# Altium PCB CamLink.PcbDoc (part 1 of 2)
Units mm, origin at the board's own origin, x right, y up, seen from the top; angles counter-clockwise.
Board outline 65 x 55 mm, 4 copper layers (TOP SIG, PWR, GND, BOT SIG), stack 1.586 mm thick; 141 components, 88 nets, 397 pads, 242 vias.
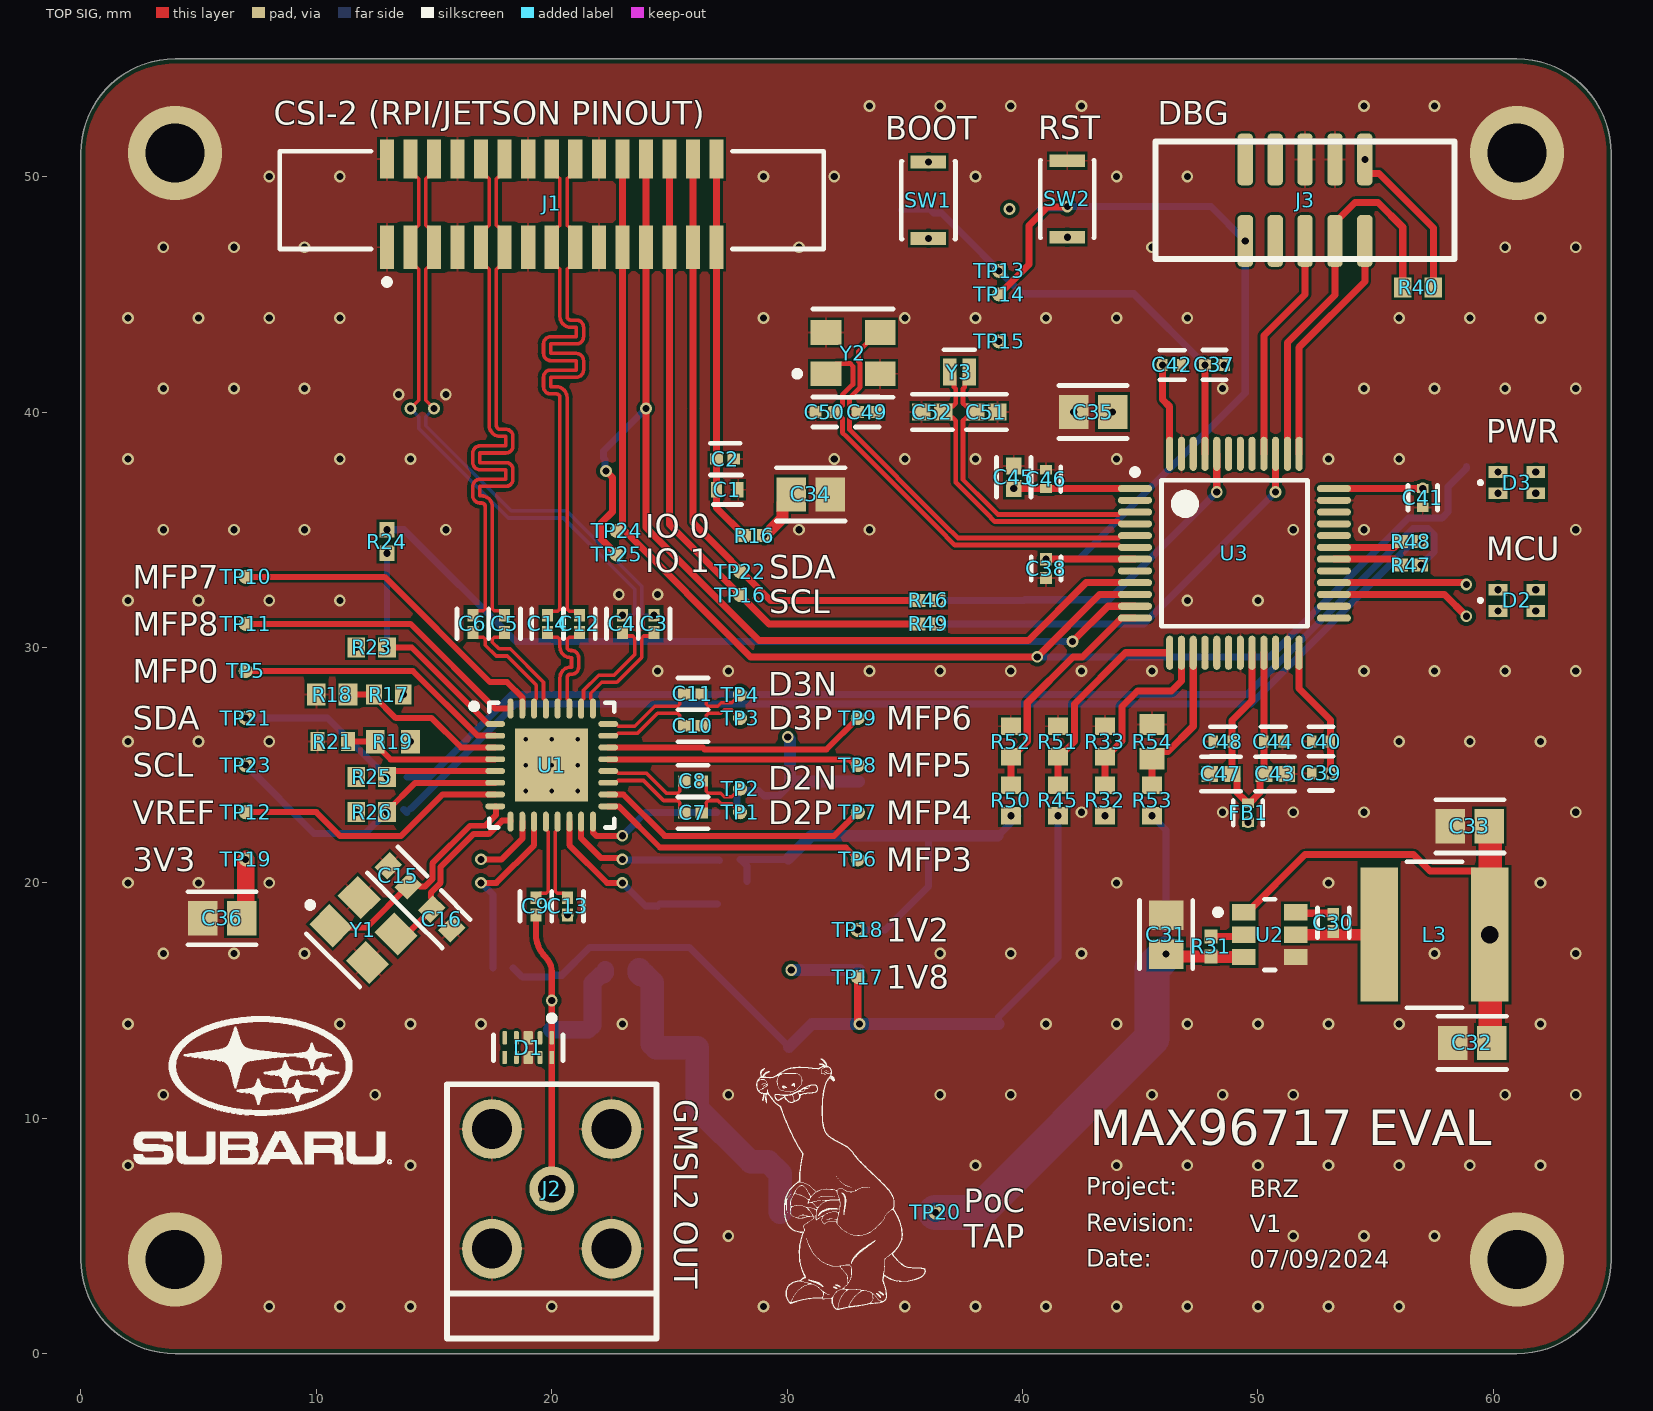
[diagram p0: TOP SIG view]
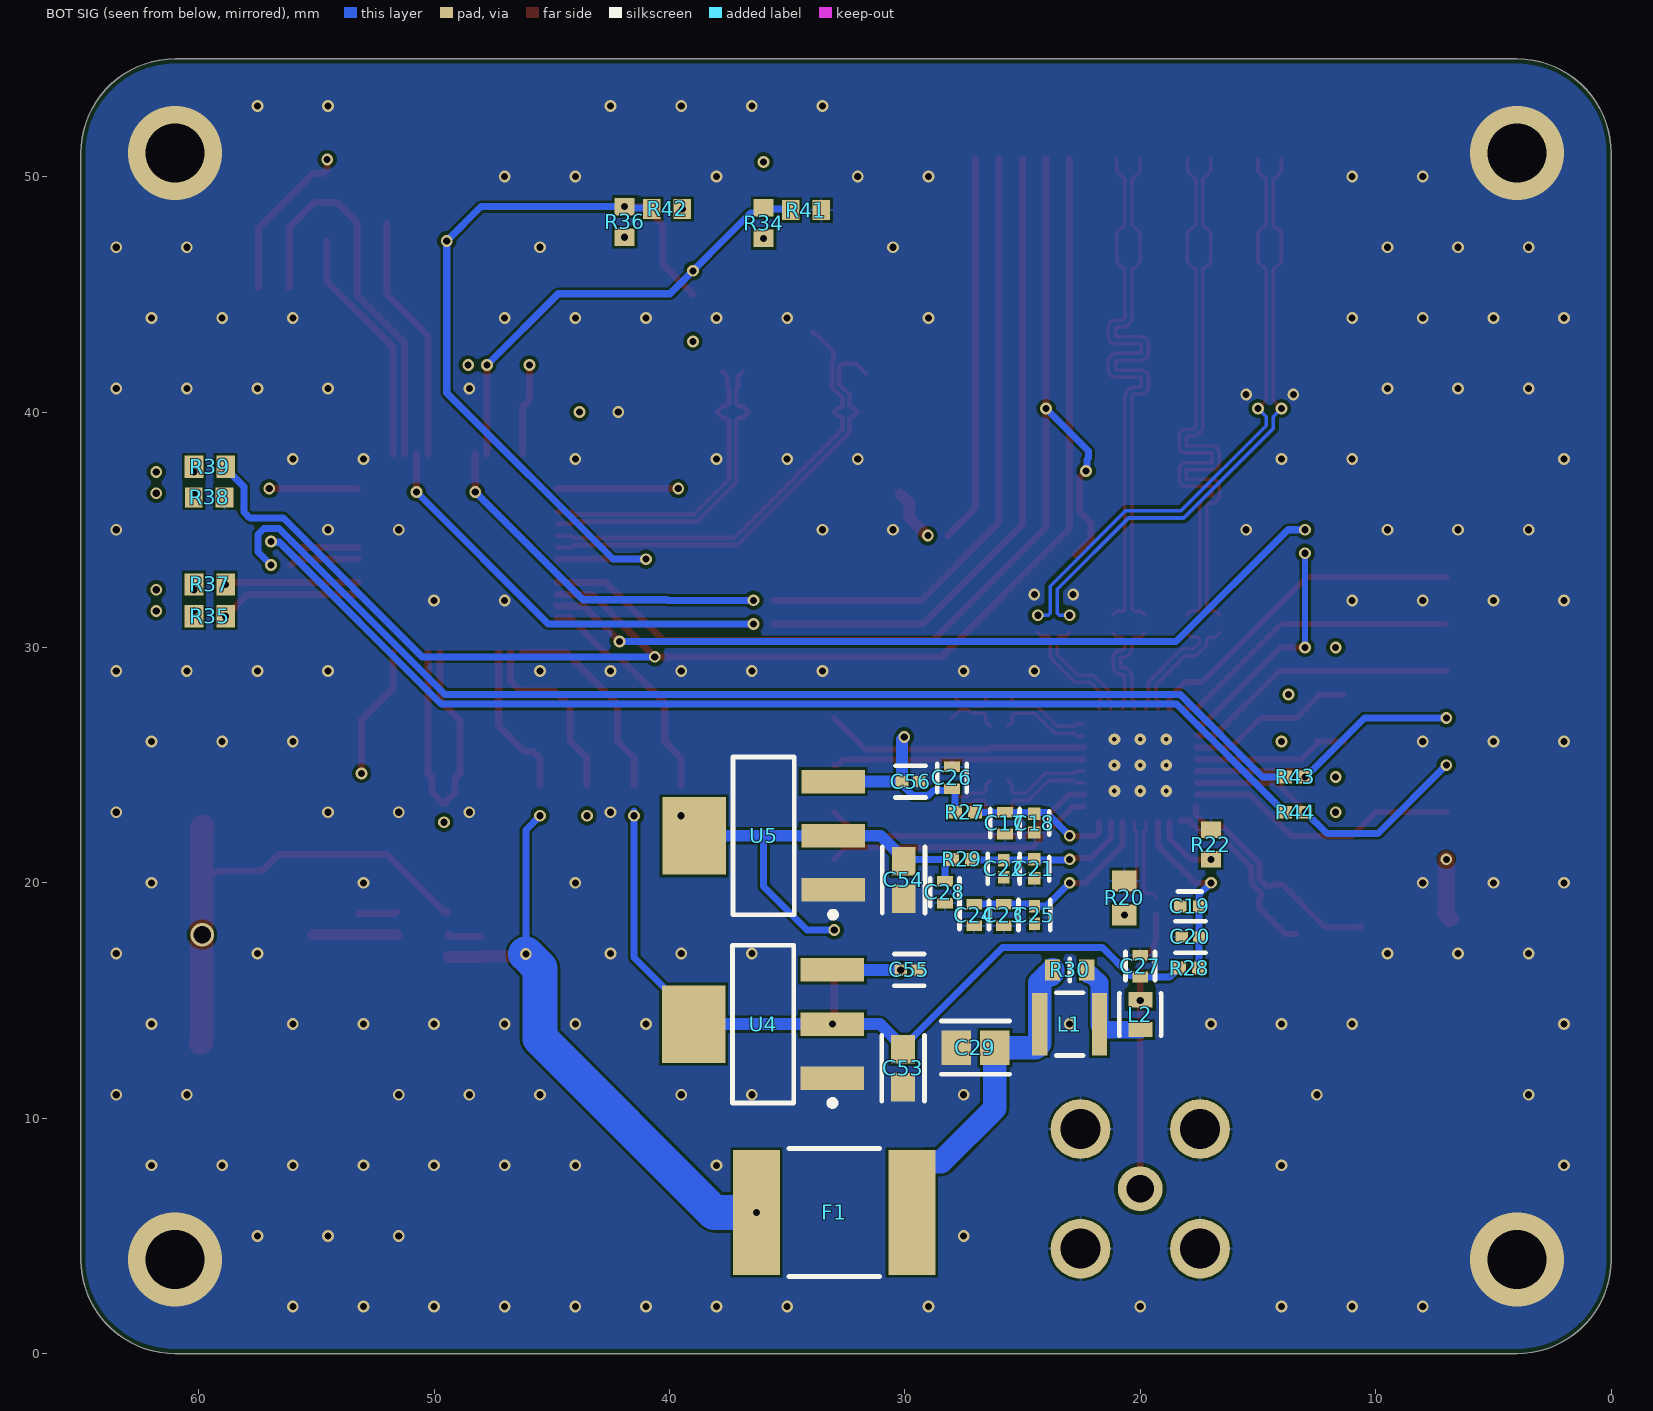
[diagram p1: BOT SIG view, seen from below]
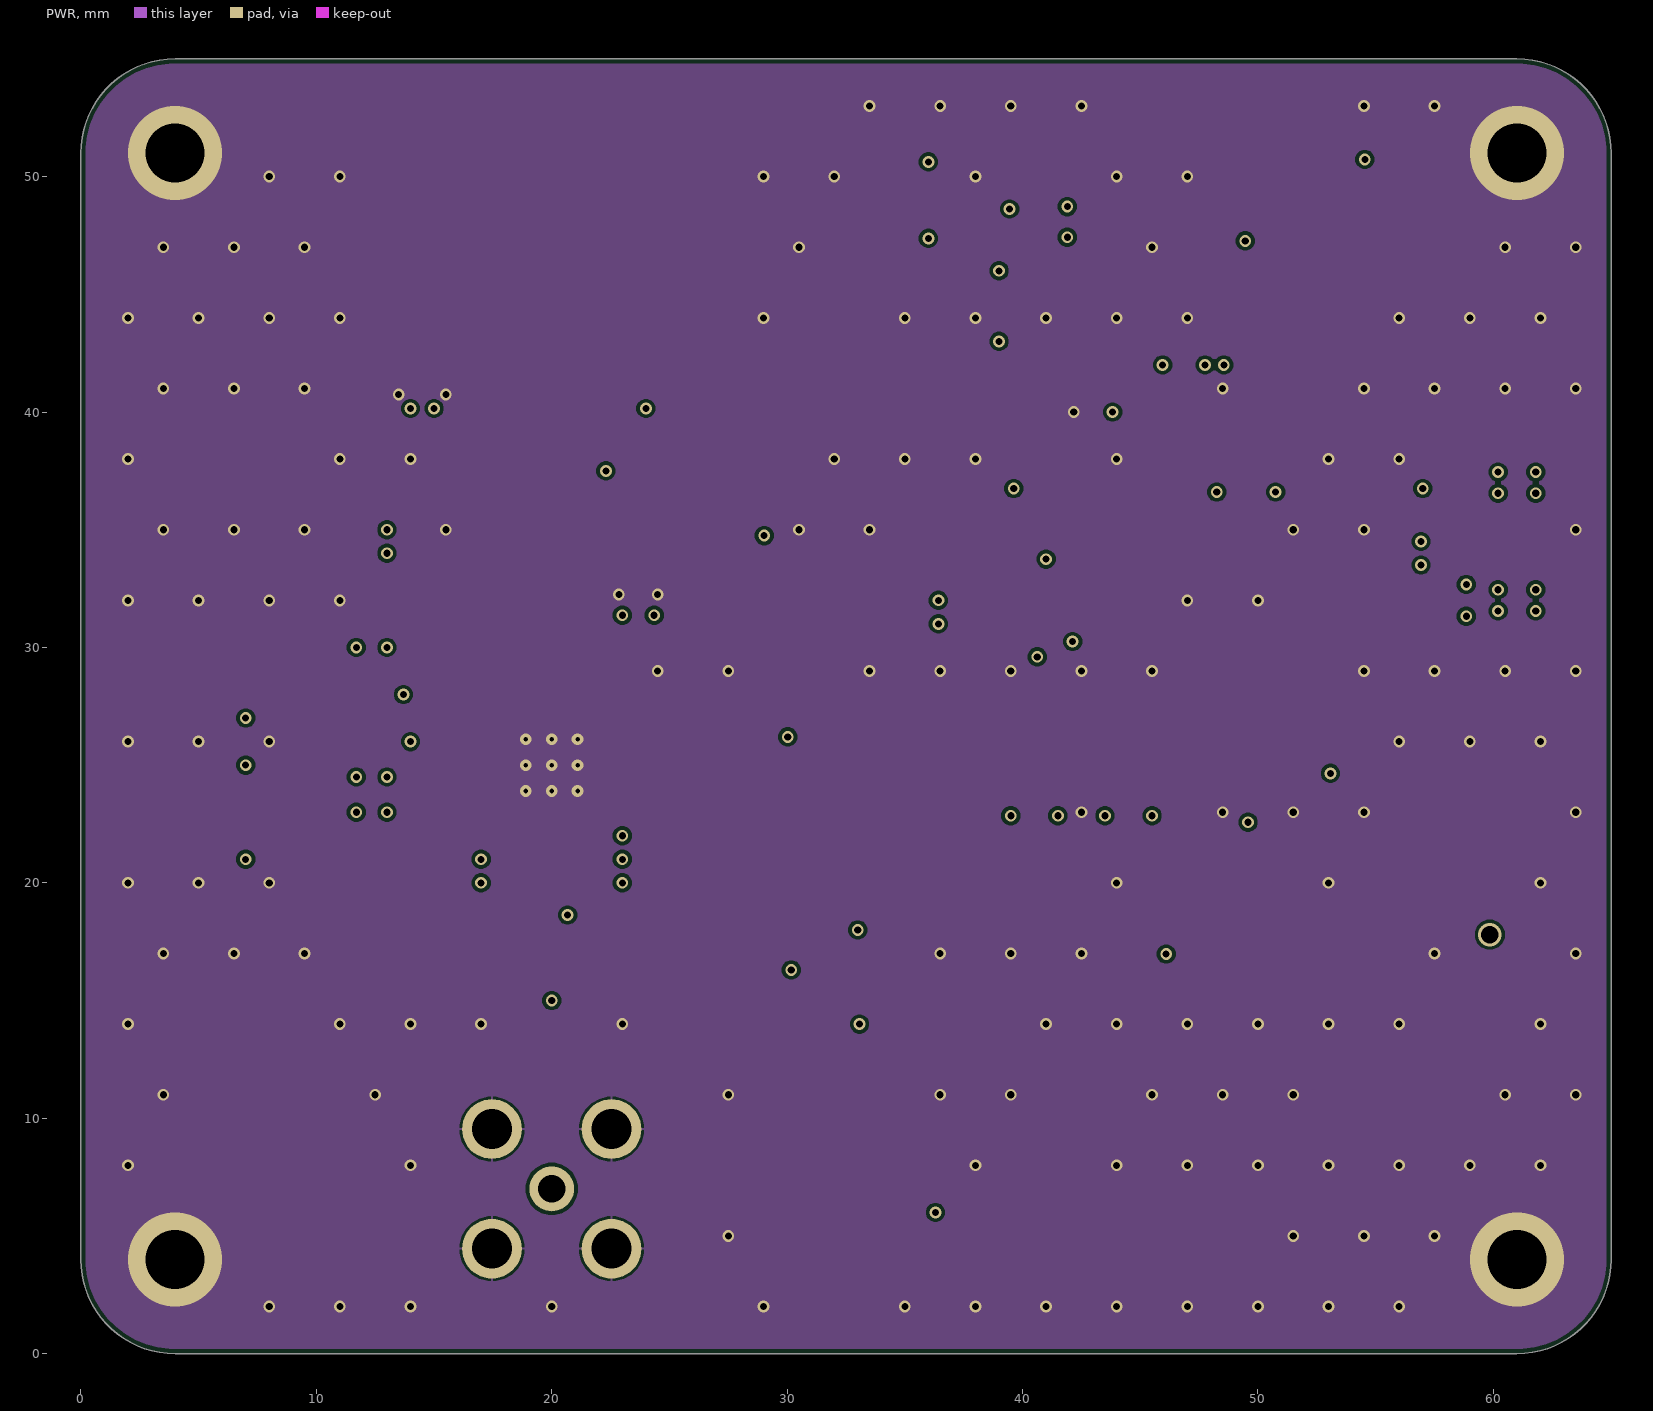
[diagram p2: PWR]
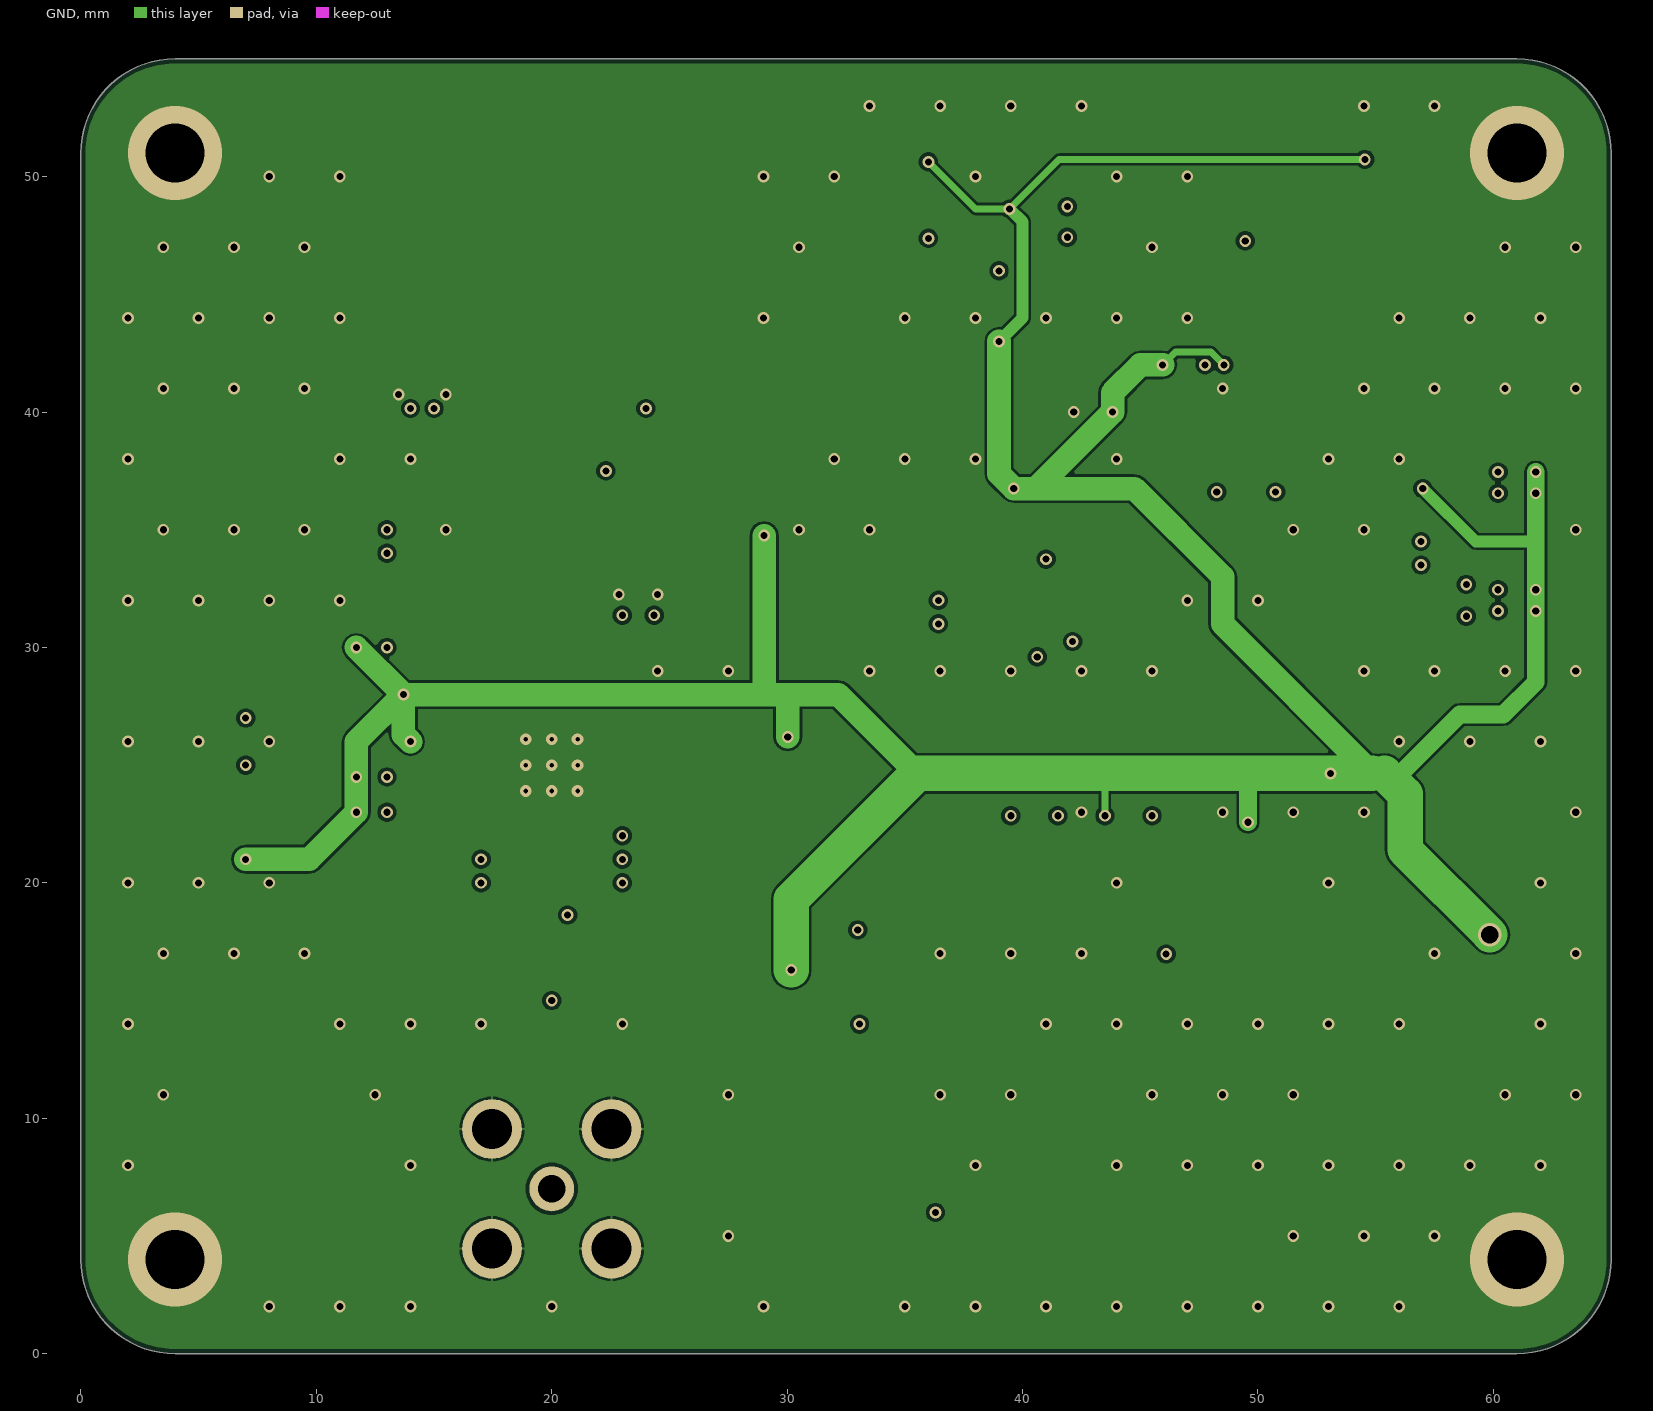
[diagram p3: GND]
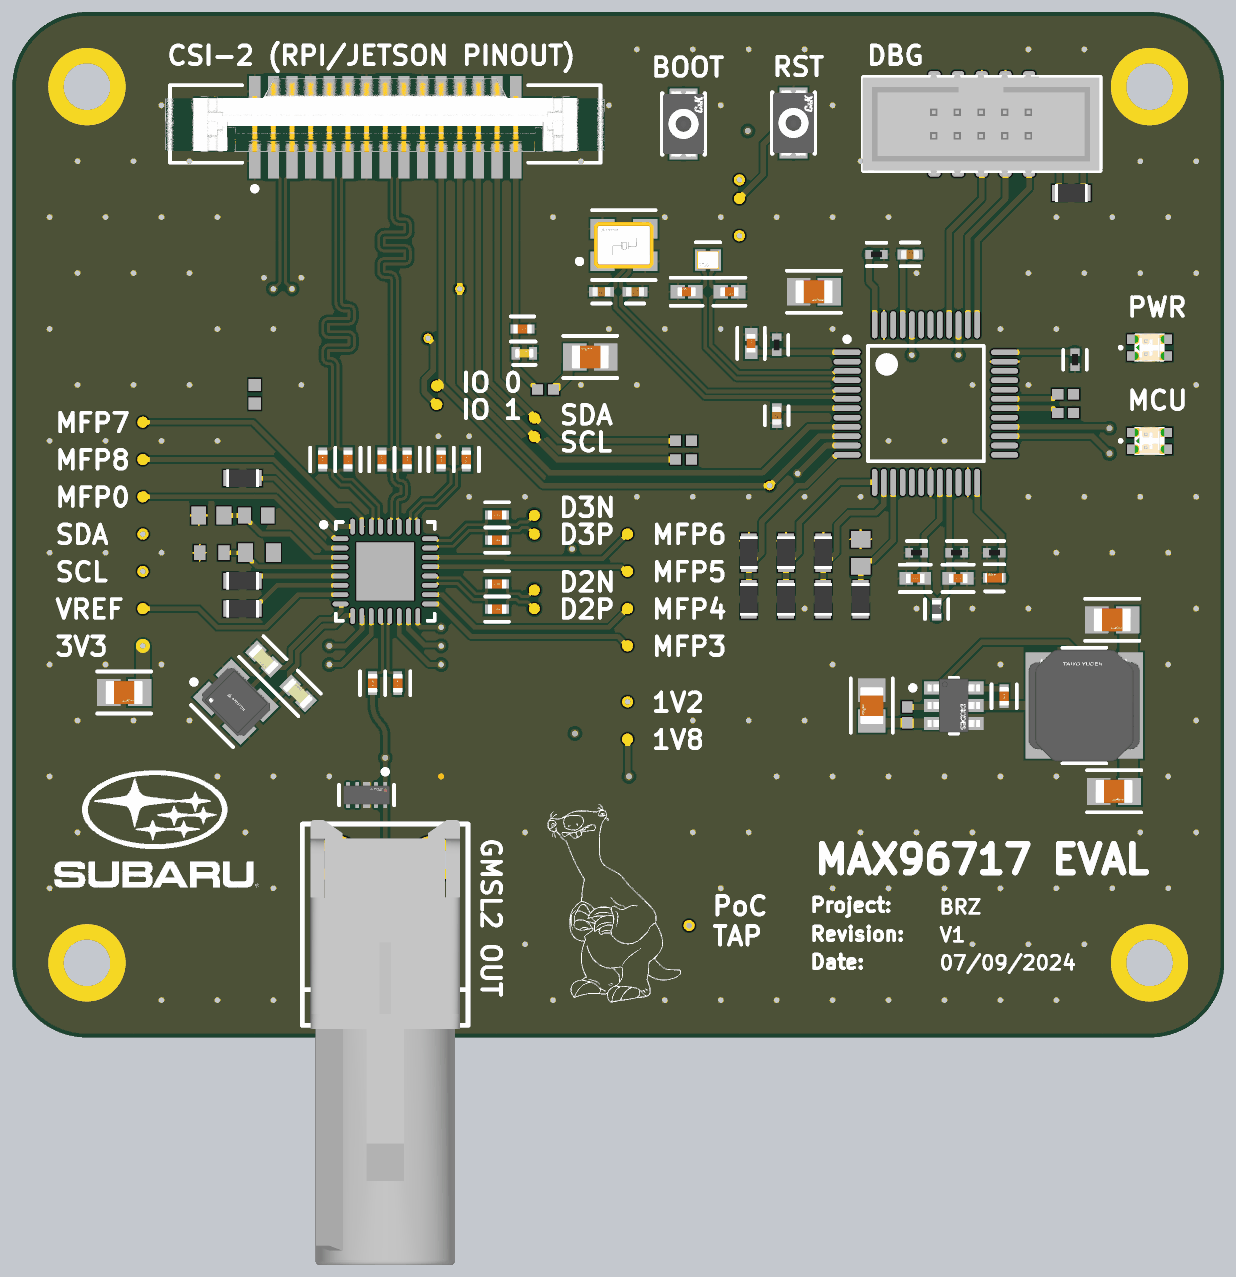
[diagram p5: 3D render of the assembled board from above, using the file's embedded part models]
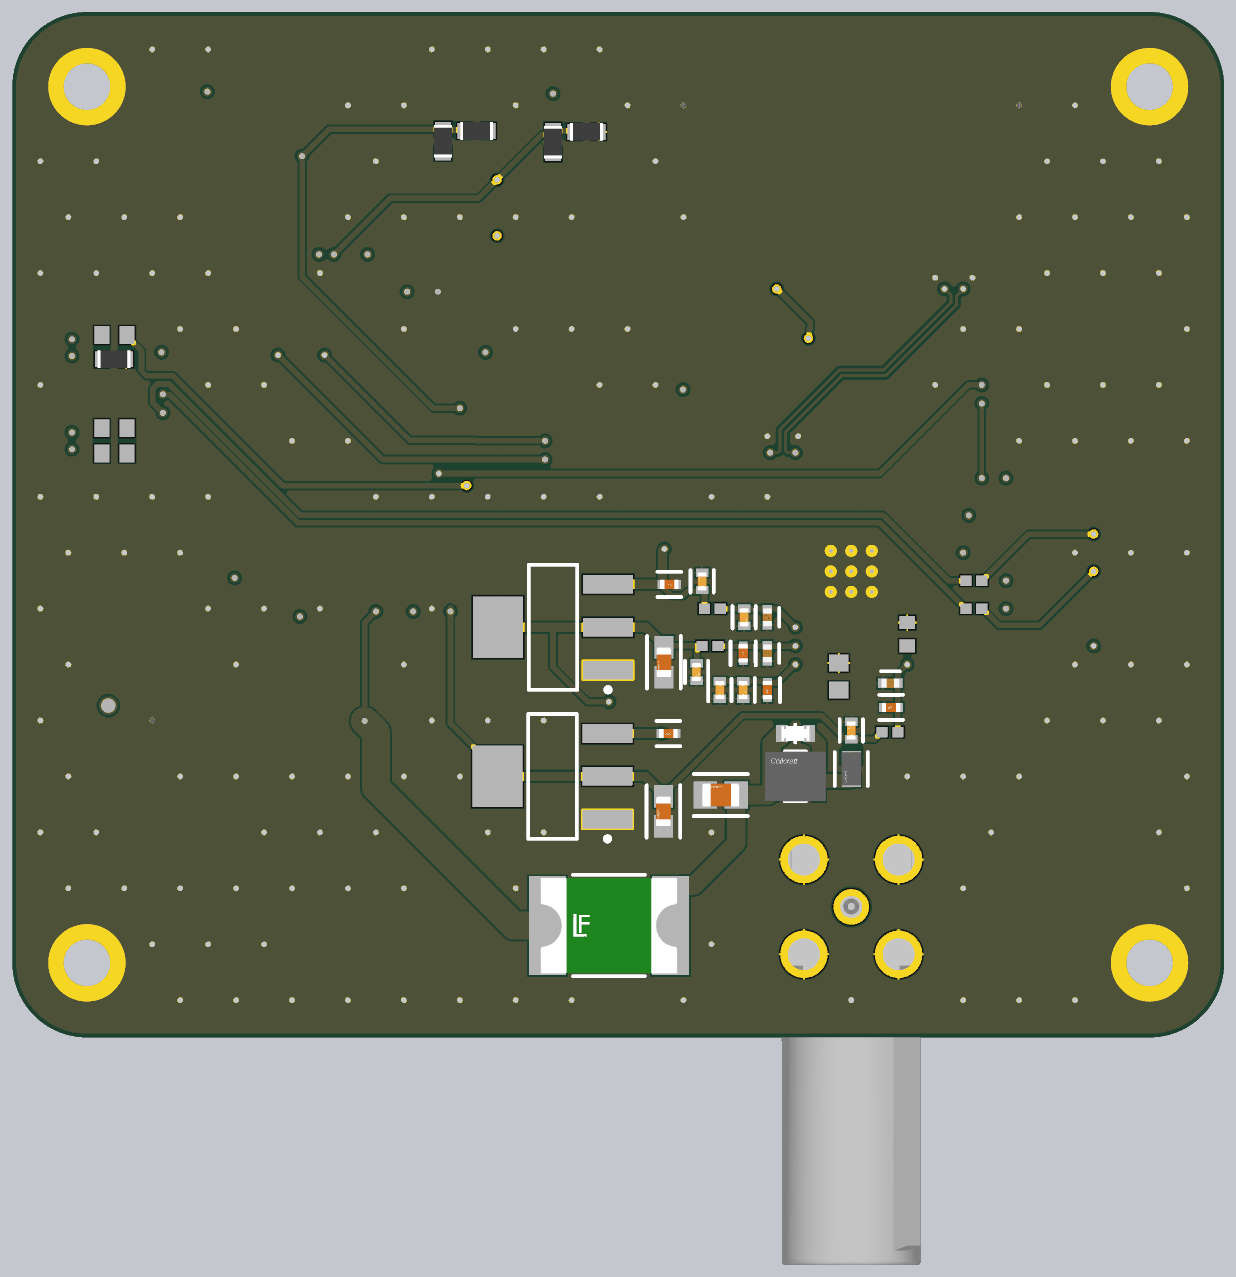
[diagram p6: 3D render of the assembled board from below, using the file's embedded part models]

## Layer stack, top to bottom
Top Solder: solder mask 0.0127, Solder Resist, Dk 3.8
TOP SIG: signal copper 0.035
Dielectric 2: prepreg 0.2104, PP-006, Dk 4.6
PWR: signal copper 0.0152
Dielectric 1: dielectric 1.065, FR-4, Dk 4.5
GND: signal copper 0.0152
Dielectric 3: prepreg 0.2104, PP-006, Dk 4.6
BOT SIG: signal copper 0.035
Bottom Solder: solder mask 0.0127, Solder Resist, Dk 3.8

## Board outline
0,4 0,51 cw(c4,51) 4,55 61,55 cw(c61,51) 65,51 65,4 cw(c61,4) 61,0 4,0 cw(c4,4)

## Design rules (kind name [scope] priority, off if disabled: settings)
BoardOutlineClearance [All] p1: gap=0.2 ignorepadtopadclearanceinfootprint=FALSE
Clearance IMPEDANCE_CLEARANCE_RULE [InDifferentialPairClass('100DIFF') OR InDifferentialPairClass('CSI') OR InDifferentialPairClass('PRECSI') OR InNetClass('50SINGLE') vs InNet('GND')] p1: gap=0.15 ignorepadtopadclearanceinfootprint=FALSE
Clearance [All] p2: gap=0.102 ignorepadtopadclearanceinfootprint=FALSE except(0.127: Arc-Via Track-Via SMDPad-Via THPad-Via Via-Via Via-Fill Via-Poly Via-Region Via-Text; 0.25: Arc-Hole Track-Hole SMDPad-Hole THPad-Hole Via-Hole Fill-Hole Poly-Hole Region-Hole Text-Hole)
ComponentClearance [All] p1: gap=0.102 collisioncheckmode=3 verticalgap=0.102 showdistances=TRUE
DiffPairsRouting DiffPairsRouting_100DIFF [InDifferentialPairClass('100DIFF') OR InDifferentialPairClass('CSI') OR InDifferentialPairClass('PRECSI')] p1: maxlimit=0.15 minlimit=0.127 mostfreqgap=0.15 toplayer_mingap=0.15 toplayer_minwidth=0.152 toplayer_maxwidth=0.152 toplayer_prefwidth=0.152 midlayer1_maxgap=0.127 midlayer1_prefgap=0.127 midlayer1_minwidth=0.09 midlayer1_maxwidth=0.09 midlayer1_prefwidth=0.09 midlayer2_maxgap=0.127 midlayer2_prefgap=0.127 midlayer2_minwidth=0.09 midlayer2_maxwidth=0.09 midlayer2_prefwidth=0.09 bottomlayer_mingap=0.15 bottomlayer_minwidth=0.152 bottomlayer_maxwidth=0.152 bottomlayer_prefwidth=0.152 impedanceprofiledriven=TRUE impedanceprofileid={05033271-96A7-41AD-92A3-8DAFB01AF02A} impedanceprofilevalue=100.000000 maxuncoupledlength=12.7
DiffPairsRouting [All] p2: maxlimit=0.102 minlimit=0.102 mostfreqgap=0.102 toplayer_minwidth=0.102 toplayer_maxwidth=1816.048 toplayer_prefwidth=0.102 midlayer1_minwidth=0.102 midlayer1_maxwidth=1816.048 midlayer1_prefwidth=0.102 midlayer2_minwidth=0.102 midlayer2_maxwidth=1816.048 midlayer2_prefwidth=0.102 bottomlayer_minwidth=0.102 bottomlayer_maxwidth=1816.048 bottomlayer_prefwidth=0.102 maxuncoupledlength=12.7
Height [All] p1: minheight=0 maxheight=1816.048 prefheight=12.7
HoleSize [All] p1: absolutevalues=TRUE maxlimit=6.3 minlimit=0.2 maxpercent=80.000 minpercent=20.000
HoleToHoleClearance [All] p1: gap=0.25 allowstackedmicrovias=FALSE
MatchedLengths PRECSILengthMatch [InDifferentialPairClass('PRECSI')] p1: tolerance=25.4 checknetsindiffpair=FALSE checkdiffpairvsdiffpair=TRUE checkxsignals=TRUE checkothers=TRUE usedelayunits=TRUE delaytolerance=8.000000
MatchedLengths CSILengthMatch [InDifferentialPairClass('CSI')] p2: tolerance=25.4 checknetsindiffpair=FALSE checkdiffpairvsdiffpair=TRUE checkxsignals=TRUE checkothers=TRUE usedelayunits=TRUE delaytolerance=8.000000
MatchedLengths CSIPairsMatchedLengths [InDifferentialPairClass('100DIFF') OR InDifferentialPairClass('CSI') OR InDifferentialPairClass('PRECSI')] p3: tolerance=25.4 checknetsindiffpair=TRUE checkdiffpairvsdiffpair=FALSE checkxsignals=FALSE checkothers=FALSE usedelayunits=TRUE delaytolerance=1.000000
MinimumAnnularRing [All] p1: minimumring=0.076
MinimumSolderMaskSliver [All] p1: minsoldermaskwidth=0
PlaneClearance [All] p1: clearance=0.102
PlaneConnect PlaneConnectPowerPads [InPadClass('PWR_PAD')] p1: planeconnectstyle=Direct reliefexpansion=0.508 reliefentries=4 reliefconductorwidth=0.254 reliefairgap=0.254
PlaneConnect [All] p2: pad.planeconnectstyle=Relief pad.reliefexpansion=0.3 pad.reliefentries=4 pad.reliefconductorwidth=0.102 pad.reliefairgap=0.102 via.planeconnectstyle=Direct via.reliefexpansion=0.3 via.reliefentries=4 via.reliefconductorwidth=0.127 via.reliefairgap=0.127
PolygonConnect PolygonConnectPowerPads [All vs (InPadClass('PWR_PAD'))] p1: connectstyle=Direct reliefconductorwidth=0.254 reliefentries=4 polygonreliefangle="90 Angle" airgapwidth=0.254
PolygonConnect [All] p2: thpad.connectstyle=Relief thpad.reliefconductorwidth=0.102 thpad.reliefentries=4 thpad.polygonreliefangle="90 Angle" thpad.airgapwidth=0.102 smdpad.connectstyle=Relief smdpad.reliefconductorwidth=0.102 smdpad.reliefentries=4 smdpad.polygonreliefangle="90 Angle" smdpad.airgapwidth=0.102 via.connectstyle=Direct via.reliefconductorwidth=0.127 via.reliefentries=4 via.polygonreliefangle="90 Angle" via.airgapwidth=0.127
RoutingVias [All] p1: holewidth=0.2 width=0.45 viastyle="Through Hole" minholewidth=0.2 minwidth=0.45 maxholewidth=6.3 maxwidth=6.55
SilkToSilkClearance [All] p1: silktosilkclearance=0
SilkToSolderMaskClearance [IsPad] p1: minsilkscreentomaskgap=0.102 clearancetoexposedcopper=TRUE
SolderMaskExpansion [All] p1: expansion=0.075 istentingtop=FALSE
Width [All] p1: maxlimit=1816.048 minlimit=0.102 preferedwidth=0.102
Width Width_50SINGLE [InNetClass('50SINGLE')] p2: maxlimit=0.261 minlimit=0.177 preferedwidth=0.261 toplayer_minwidth=0.261 midlayer1_maxwidth=0.177 midlayer1_prefwidth=0.177 midlayer2_maxwidth=0.177 midlayer2_prefwidth=0.177 bottomlayer_minwidth=0.261 impedanceprofiledriven=TRUE impedanceprofileid={9603FAC9-37DA-43D8-8531-A7B1C5BCF3E8} impedanceprofilevalue=50.000000 minimp=50.000000 maximp=50.000000 favimp=50.000000
20 further rules are at their usual default settings.

## Classes and differential pairs
pad class PWR_PAD: C29-1 C29-2 C31-1 C31-2 C32-1 C32-2 C33-1 C33-2 C34-1 C34-2 C35-1 C35-2 C36-1 C36-2 C53-1 C53-2 C54-1 C54-2 C55-1 C55-2 C56-1 C56-2 D1-3 D1-8 F1-1 F1-2 L1-1 L1-2 L2-1 L2-2 L3-1 L3-2 U2-3 U2-4 U2-5 U4-1 U4-2 U4-3 U4-4 U5-1 U5-2 U5-3 U5-4
differential pair class 100DIFF: CSI_D2 CSI_D3 SIO
differential pair class PRECSI: CSI_CLK CSI_D0 CSI_D1
net class 50SINGLE: PoC_TAP
differential pair class CSI: CLK DA0 DA1 DA2 DA3
component class CONFIG_MCU: C37 C38 C39 C40 C41 C42 C43 C44 C45 C46 C47 C48 C49 C50 C51 C52 D2 D3 FB1 J3 R34 R35 R36 R37 R38 R39 R40 R41 R42 R46 R47 R48 R49 SW1 SW2 TP13 TP14 TP15 U3 Y2 Y3
component class CamLink: C1 C2 J1 R16 R43 R44 TP1 TP2 TP3 TP4 TP16 TP21 TP22 TP23 TP24 TP25
component class CAM_IF: C3 C4 C5 C6 C7 C8 C9 C10 C11 C12 C13 C14 C15 C16 C17 C18 C19 C20 C21 C22 C23 C24 C25 C26 C27 C28 C29 C53 C54 C55 C56 D1 F1 J2 L1 L2 R17 R18 R19 R20 R21 R22 R23 R24 R25 R26 R27 R28 R29 R30 R45 R50 R51 R52 R53 R54 TP5 TP6 TP7 TP8 TP9 TP10 TP11 TP12 TP17 TP18 TP19 TP20 U1 U4 U5 Y1
component class ADJ_REG: C30 C31 C32 C33 C34 C35 C36 L3 R31 R32 R33 U2
differential pair CSI_D3: +CSI_D3_P -CSI_D3_N
differential pair CSI_D2: +CSI_D2_P -CSI_D2_N
differential pair X: +X_P -X_N
differential pair X32: +X32_P -X32_N
differential pair X25: +X25_P -X25_N
differential pair SIO: +SIO_P -SIO_N
differential pair DA3: +DA3_P -DA3_N
differential pair DA2: +DA2_P -DA2_N
differential pair DA1: +DA1_P -DA1_N
differential pair DA0: +DA0_P -DA0_N
differential pair CSI_D1: +CSI_D1_P -CSI_D1_N
differential pair CSI_D0: +CSI_D0_P -CSI_D0_N
differential pair CSI_CLK: +CSI_CLK_P -CSI_CLK_N
differential pair CLK: +CLK_P -CLK_N

## Components (designator, comment, footprint, x,y, rotation, side; value= is the part's Value field where it differs from the comment)
C1 "CL05A106MP5NUNC" FP-CL05A106MP5NUNC-MFG 27.463,36.7 r0 top value=10uF
C2 "C1005X7R1H104K050BB" FP-C1005-050-0_05-IPC_C 27.367,38 r180 top
C3 "C1005X7R1H104K050BB" FP-C1005-050-0_05-IPC_C 24.35,31 r270 top
C4 "C1005X7R1H104K050BB" FP-C1005-050-0_05-IPC_C 23,31 r270 top
C5 "C1005X7R1H104K050BB" FP-C1005-050-0_05-IPC_C 18,31 r270 top
C6 "C1005X7R1H104K050BB" FP-C1005-050-0_05-IPC_C 16.65,31 r270 top
C7 "C1005X7R1H104K050BB" FP-C1005-050-0_05-IPC_C 26,22.975 r180 top
C8 "C1005X7R1H104K050BB" FP-C1005-050-0_05-IPC_C 26,24.325 r180 top
C9 "C1005X7R1H104K050BB" FP-C1005-050-0_05-IPC_C 19.325,19 r270 top
C10 "C1005X7R1H104K050BB" FP-C1005-050-0_05-IPC_C 26,26.675 r180 top
C11 "C1005X7R1H104K050BB" FP-C1005-050-0_05-IPC_C 26,28.025 r180 top
C12 "C1005X7R1H104K050BB" FP-C1005-050-0_05-IPC_C 21.175,31 r270 top
C13 "C1005X7R1H104K050BB" FP-C1005-050-0_05-IPC_C 20.675,19 r270 top
C14 "C1005X7R1H104K050BB" FP-C1005-050-0_05-IPC_C 19.825,31 r270 top
C15 "C0603C300J5GACTU" FP-C0603C-CF-MFG 13.485,20.298 r135 top value="30 pF"
C16 "C0603C300J5GACTU" FP-C0603C-CF-MFG 15.323,18.46 r315 top value="30 pF"
C17 "CL05A106MP5NUNC" FP-CL05A106MP5NUNC-MFG 25.75,22.537 r270 bottom value=10uF
C18 "C0402C103M5RACTU" FP-C0402-BB-MFG 24.5,22.537 r90 bottom value="10,000 pF"
C19 "C0402C103M5RACTU" FP-C0402-BB-MFG 17.9,19 r180 bottom value="10,000 pF"
C20 "C1005X7R1H104K050BB" FP-C1005-050-0_05-IPC_C 17.867,17.7 r180 bottom
C21 "C0402C103M5RACTU" FP-C0402-BB-MFG 24.5,20.6 r90 bottom value="10,000 pF"
C22 "C1005X7R1H104K050BB" FP-C1005-050-0_05-IPC_C 25.8,20.6 r90 bottom
C23 "CL05A106MP5NUNC" FP-CL05A106MP5NUNC-MFG 25.8,18.633 r270 bottom value=10uF
C24 "CL05A106MP5NUNC" FP-CL05A106MP5NUNC-MFG 27.05,18.633 r270 bottom value=10uF
C25 "C1005X7R1H104K050BB" FP-C1005-050-0_05-IPC_C 24.5,18.633 r90 bottom
C26 "CL05A106MP5NUNC" FP-CL05A106MP5NUNC-MFG 28,24.462 r90 bottom value=10uF
C27 "CL05A106MP5NUNC" FP-CL05A106MP5NUNC-MFG 20,16.462 r90 bottom value=10uF
C28 "CL05A106MP5NUNC" FP-CL05A106MP5NUNC-MFG 28.3,19.6 r270 bottom value=10uF
C29 "GRM21BR61E226ME44L" FP-GRM21B-0_2-e0_2_0_7-IPC_B 27,13 r0 bottom
C30 "C1005X7R1H104K050BB" FP-C1005-050-0_05-IPC_C 53.2,18.3 r270 top
C31 "GRM21BR61E226ME44L" FP-GRM21B-0_2-e0_2_0_7-IPC_B 46.1,17.8 r270 top
C32 "GRM21BR61E226ME44L" FP-GRM21B-0_2-e0_2_0_7-IPC_B 59.1,13.2 r0 top
C33 "GRM21BR61E226ME44L" FP-GRM21B-0_2-e0_2_0_7-IPC_B 59,22.4 r0 top
C34 "GRM21BR61E226ME44L" FP-GRM21B-0_2-e0_2_0_7-IPC_B 31,36.5 r180 top
C35 "GRM21BR61E226ME44L" FP-GRM21B-0_2-e0_2_0_7-IPC_B 43,40 r0 top
C36 "GRM21BR61E226ME44L" FP-GRM21B-0_2-e0_2_0_7-IPC_B 6,18.5 r0 top
C37 "C0402C104K8PACTU" FP-C0402-BB-MFG 48.15,42 r0 top value="0.10 μF"
C38 "C0402C104K8PACTU" FP-C0402-BB-MFG 41,33.35 r270 top value="0.10 μF"
C39 "C1005X5R1A475K050BC" FP-C1005-050-0_15-MFG 52.679,24.65 r180 top
C40 "GRM155R71C104KA88D" FP-GRM15-MFG 52.679,26 r0 top value=0.10μF
C41 "GRM155R71C104KA88D" FP-GRM15-MFG 57,36.35 r90 top value=0.10μF
C42 "GRM155R71C104KA88D" FP-GRM15-MFG 46.35,42 r180 top value=0.10μF
C43 "EMK105BJ105KV-F" FP-0402-L_1_0_0_05-W_0_5-IPC_A 50.729,24.625 r0 top
C44 "GRM155R71C104KA88D" FP-GRM15-MFG 50.65,26 r180 top value=0.10μF
C45 "EMK105BJ105KV-F" FP-0402-L_1_0_0_05-W_0_5-IPC_A 39.625,37.229 r90 top
C46 "GRM155R71C104KA88D" FP-GRM15-MFG 41,37.15 r270 top value=0.10μF
C47 "EMK105BJ105KV-F" FP-0402-L_1_0_0_05-W_0_5-IPC_A 48.429,24.625 r180 top
C48 "GRM155R71C104KA88D" FP-GRM15-MFG 48.504,26 r0 top value=0.10μF
C49 "C0402C689C5GACTU" FP-C0402-BB-MFG 33.4,40 r0 top value="6.8 pF"
C50 "C0402C689C5GACTU" FP-C0402-BB-MFG 31.6,40 r180 top value="6.8 pF"
C51 "04025A180FAT2A" FP-0402-L_1_0_1-W_0_5_0_1-IPC_A 38.466,40 r0 top
C52 "04025A180FAT2A" FP-0402-L_1_0_1-W_0_5_0_1-IPC_A 36.166,40 r180 top
C53 "GRM188R60J106ME47D" FP-GRM188-0_1-e0_2_0_55-IPC_A 30.075,12.125 r270 bottom
C54 "GRM188R60J106ME47D" FP-GRM188-0_1-e0_2_0_55-IPC_A 30.05,20.125 r270 bottom
C55 "C1005X7R1H104K050BB" FP-C1005-050-0_05-IPC_C 29.808,16.3 r0 bottom
C56 "C1005X7R1H104K050BB" FP-C1005-050-0_05-IPC_C 29.758,24.3 r0 bottom
D1 "ESD204DQAR" FP-DQA0010A-MFG 19,13 r270 top value=0.55pF
D2 "150066RG54050" WL-SBCD_0606 61,32 r90 top
D3 "150066RG54050" WL-SBCD_0606 61,37 r90 top
F1 "2920L050DR" FP-2920L050DR-MFG 33,6 r180 bottom
FB1 "BLM15PX601SN1D" FP-BLM15-0_05-MFG 49.579,22.975 r90 top
J1 "1-1734248-5" FP-1-1734248-5-MFG 20,49 r180 top
J2 "FA1-NDRP-PCB-8" FA1-NDRP-PCB-8-Footprint-1 20,7 r180 top
J3 "3220-10-0300-00" 3220-10-0300-00-Footprint-1 52,49 r270 top
L1 "ADL32VHC-220M" FP-1210POC-MFG 23,14 r180 bottom value=22uH
L2 "PFL1609-561MEW" FP-PFL1609-MFG 20,14.4 r90 bottom value=0.56uH
L3 "NR6028T4R7M" FP-NR6028-MFG 57.5,17.8 r0 top
R16 "RC0402JR-070RL" RESC1005X40X25NL05T10 28.6,34.75 r0 top
R17 "ERJ-3EKF8062V" RESC1608X55X30LL15T15#1 13.075,28 r0 top
R18 "ERJ-3EKF2052V" RESC1608X55X30NL15T15 10.675,28 r0 top
R19 "RC0603FR-0732K4L" RESC1608X55X25ML10T15 13.25,26 r0 top
R20 "ERJ-3EKF49R9V" RESC1608X55X30ML15T15 20.675,19.358 r270 bottom
R21 "RC0603FR-0768K1L" RESC1608X55X25LL10T15 10.7,26 r0 top
R22 "ERJ-3EKF4020V" RESC1608X55X30LL15T15#1 17,21.625 r270 bottom
R23 "ERJ3EKF1002V" RESC1609X55X30LL15T15 12.35,30 r180 top
R24 "0402 JUMPER" RESC1005X40X25ML05T05 13,34.5 r90 top
R25 "ERJ3EKF1002V" RESC1609X55X30LL15T15 12.35,24.5 r180 top
R26 "ERJ3EKF1002V" RESC1609X55X30LL15T15 12.35,23 r180 top
R27 "RC0402JR-070RL" RESC1005X40X25NL05T10 27.45,23 r180 bottom
R28 "RC0402JR-070RL" RESC1005X40X25NL05T10 17.925,16.375 r180 bottom
R29 "RC0402JR-070RL" RESC1005X40X25NL05T10 27.575,21 r180 bottom
R30 "ERJ-3EKF5101V" FP-ERJ3EK-MFG 23,16.3 r180 bottom
R31 "RC0402JR-070RL" RESC1005X40X25NL05T10 48,17.3 r270 top
R32 "ERJ3EKF1002V" RESC1609X55X30LL15T15 43.5,23.5 r270 top
R33 "ERJ3EKF1002V" RESC1609X55X30LL15T15 43.5,26 r270 top
R34 "ERJ-3EKF3300V" RESC1608X55X30LL15T15#2 36,48.025 r270 bottom
R35 "ERJ3EKF56R0V" RESC1608X55X30NL15T15 59.525,31.325 r0 bottom
R36 "ERJ-3EKF3300V" RESC1608X55X30LL15T15#2 41.9,48.075 r270 bottom
R37 "ERJ3EKF56R0V" RESC1608X55X30NL15T15 59.525,32.675 r0 bottom
R38 "ERJ-3EKF3300V" RESC1608X55X30LL15T15#2 59.55,36.375 r180 bottom
R39 "ERJ3EKF56R0V" RESC1608X55X30NL15T15 59.525,37.675 r0 bottom
R40 "ERJ3EKF1002V" RESC1609X55X30LL15T15 56.8,45.3 r180 top
R41 "ERJ3EKF1002V" RESC1609X55X30LL15T15 34.2,48.575 r0 bottom
R42 "ERJ3EKF1002V" RESC1609X55X30LL15T15 40.1,48.625 r0 bottom
R43 "RC0402JR-070RL" RESC1005X40X25NL05T10 13.425,24.5 r180 bottom
R44 "RC0402JR-070RL" RESC1005X40X25NL05T10 13.425,23 r180 bottom
R45 "ERJ3EKF1002V" RESC1609X55X30LL15T15 41.5,23.5 r270 top
R46 "RC0402JR-070RL" RESC1005X40X25NL05T10 36,32 r180 top
R47 "RC0402JR-070RL" RESC1005X40X25NL05T10 56.5,33.5 r180 top
R48 "RC0402JR-070RL" RESC1005X40X25NL05T10 56.5,34.5 r180 top
R49 "RC0402JR-070RL" RESC1005X40X25NL05T10 36,31 r0 top
R50 "ERJ3EKF1002V" RESC1609X55X30LL15T15 39.5,23.5 r270 top
R51 "ERJ3EKF1002V" RESC1609X55X30LL15T15 41.5,26 r270 top
R52 "ERJ3EKF1002V" RESC1609X55X30LL15T15 39.5,26 r270 top
R53 "ERJ3EKF1002V" RESC1609X55X30LL15T15 45.5,23.5 r270 top
R54 "ERJ-3EKF2001V" RESC1608X55X30ML15T15 45.5,26 r270 top
SW1 "KXT331LHS" FP-KXT331LHS-MFG 36,49 r90 top
SW2 "KXT331LHS" FP-KXT331LHS-MFG 41.9,49.05 r90 top
TP1 "TPAD6R" "New footprint 1" 28,23 r90 top
TP2 "TPAD6R" "New footprint 1" 28,24 r90 top
TP3 "TPAD6R" "New footprint 1" 28,27 r90 top
TP4 "TPAD6R" "New footprint 1" 28,28 r90 top
TP5 "TPAD6R" "New footprint 1" 7,29 r90 top
TP6 "TPAD6R" "New footprint 1" 33,21 r90 top
TP7 "TPAD6R" "New footprint 1" 33,23 r90 top
TP8 "TPAD6R" "New footprint 1" 33,25 r90 top
TP9 "TPAD6R" "New footprint 1" 33,27 r90 top
TP10 "TPAD6R" "New footprint 1" 7,33 r90 top
TP11 "TPAD6R" "New footprint 1" 7,31 r90 top
TP12 "TPAD6R" "New footprint 1" 7,23 r90 top
TP13 "TPAD6R" "New footprint 1" 39,46 r90 top
TP14 "TPAD6R" "New footprint 1" 39,45 r90 top
TP15 "TPAD6R" "New footprint 1" 39,43 r90 top
TP16 "TPAD6R" "New footprint 1" 28,32.225 r90 top
TP17 "TPAD6R" "New footprint 1" 33,16 r90 top
TP18 "TPAD6R" "New footprint 1" 33,18 r90 top
TP19 "TPAD6R" "New footprint 1" 7,21 r90 top
TP20 "TPAD6R" "New footprint 1" 36.3,6 r0 top
TP21 "TPAD6R" "New footprint 1" 7,27 r90 top
TP22 "TPAD6R" "New footprint 1" 28,33.225 r90 top
TP23 "TPAD6R" "New footprint 1" 7,25 r90 top
TP24 "TPAD6R" "New footprint 1" 22.763,34.952 r90 top
TP25 "TPAD6R" "New footprint 1" 22.763,33.952 r90 top
U1 "MAX96717FGTJ/VY+T" QFN50P500X500X80_HS-33N 20,25 r0 top
U2 "AP63203WU-7" FP-TSOT26-MFG 50.5,17.8 r0 top
U3 "STM32G431C6T6" TSQFP50P900X900X160-48N 49,34 r0 top
U4 "LD1117S18TR" SOT-223_M 36.025,14 r0 bottom
U5 "LD1117S12TR" SOT-223_M 36,22 r0 bottom
Y1 "ABM8G-25.000MHZ-18-D2Y-T" FP-ABM8G-MFG 12,18 r315 top
Y2 "ABM8-48.000MHZ-B2-T" FP-ABM8-MFG 32.8,42.5 r0 top
Y3 "ECS-.327-12.5-1210-TR" FP-ECX-1210-MFG 37.316,41.7 r180 top

## Footprints (in the part's own frame and the unit in brackets; to place one, negate y for a bottom-side part, rotate by r counter-clockwise, add the part's x,y. Pads: shape width x height; smd on the part's side, far side on the other; paste and mask are expansions set on the pad)
3220-10-0300-00-Footprint-1 [mm]
  rrect50% 2.2x0.65 smd: 1(-1.73,2.54) 2(1.73,2.54) 3(-1.73,1.27) 4(1.73,1.27) 5(-1.73,0) 6(1.73,0) 7(-1.73,-1.27) 8(1.73,-1.27) 9(-1.73,-2.54) 10(1.73,-2.54)
  silkscreen extent -2.5,-6.35 2.5,6.35, body extent -2.74,-6.39 2.76,6.31, height 5.22
FA1-NDRP-PCB-8-Footprint-1 [mil]
  round 75 hole 46: 1(0,0)
  round 100 hole 67: 2(-100,100) 2(-100,-100) 2(100,100) 2(100,-100)
  silkscreen extent -175,-175 175,250, body extent -157,-183 157,758, height 421
FP-1-1734248-5-MFG [mm]
  rect 0.6x1.65 smd paste+0 mask+0: 1(7,-1.75) 2(6,-1.75) 3(5,-1.75) 4(4,-1.75) 5(3,-1.75) 6(2,-1.75) 7(1,-1.75) 8(0,-1.75) 9(-1,-1.75) 10(-2,-1.75) 11(-3,-1.75) 12(-4,-1.75) 13(-5,-1.75) 14(-6,-1.75) 15(-7,-1.75)
  rect 0.6x1.85 smd paste+0 mask+0: 1(7,2) 2(6,2) 3(5,2) 4(4,2) 5(3,2) 6(2,2) 7(1,2) 8(0,2) 9(-1,2) 10(-2,2) 11(-3,2) 12(-4,2) 13(-5,2) 14(-6,2) 15(-7,2)
  silkscreen extent -11.55,-2.07 11.55,3.6, body extent -11.65,-2.67 11.65,3.02, height 0.25
FP-0402-L_1_0_0_05-W_0_5-IPC_A [mm]
  rect 0.715x0.672 smd paste+0 mask+0: 1(-0.479,0) 2(0.479,0)
  silkscreen extent -0.84,-0.74 0.84,0.74, body extent -1.04,-0.54 1.04,0.54, height 0.25
FP-0402-L_1_0_1-W_0_5_0_1-IPC_A [mm]
  rect 0.781x0.712 smd paste+0 mask+0: 1(-0.466,0) 2(0.466,0)
  silkscreen extent -0.86,-0.76 0.86,0.76, body extent -1.06,-0.56 1.06,0.56, height 0.25
FP-1210POC-MFG [mm]
  rect 0.65x2.65 smd paste+0 mask+0: 1(-1.27,0) 2(1.27,0)
  silkscreen extent -0.57,-1.34 0.57,1.34, body extent -1.65,-1.34 1.65,1.34, height 3
FP-2920L050DR-MFG [mm]
  rect 2x5.3 smd paste+0 mask+0: 1(-3.3,0) 2(3.3,0)
  silkscreen extent -1.92,-2.72 1.92,2.72, body extent -3.68,-2.56 3.68,2.56, height 2
FP-ABM8-MFG [mm]
  rect 1.3x1.05 smd paste+0 mask+0: 1(-1.15,-0.875) 2(1.15,-0.875) 3(1.15,0.875) 4(-1.15,0.875)
  silkscreen extent -2.5,-1.88 1.7,1.88, body extent -1.9,-1.5 1.9,1.5, height 0.25
FP-ABM8G-MFG [mm]
  rect 1.4x1.2 smd paste+0 mask+0: 1(-1.1,-0.85) 2(1.1,-0.85) 3(1.1,0.85) 4(-1.1,0.85)
  silkscreen extent -2.47,-1.82 1.6,1.82, body extent -1.9,-1.55 1.9,1.55, height 0.25
FP-BLM15-0_05-MFG [mm]
  rect 0.4x0.5 smd paste+0 mask+0: 1(-0.4,0) 2(0.4,0)
  silkscreen extent -0.53,-0.63 0.52,0.63, body extent -0.7,-0.38 0.7,0.38, height 0.25
FP-C0402-BB-MFG [mm]
  rect 0.52x0.52 smd paste+0 mask+0: 1(-0.4,0) 2(0.4,0)
  silkscreen extent -0.5,-0.64 0.5,0.64, body extent -0.5,-0.25 0.5,0.25, height 0.55
FP-C0603C-CF-MFG [mm]
  rect 0.75x0.9 smd paste+0 mask+0: 1(-0.6,0) 2(0.6,0)
  silkscreen extent -0.87,-0.85 0.88,0.85, body extent -1.2,-0.6 1.2,0.6, height 0.25
FP-C1005-050-0_05-IPC_C [mm]
  rect 0.539x0.472 smd paste+0 mask+0: 1(-0.367,0) 2(0.367,0)
  silkscreen extent -0.64,-0.67 0.64,0.67, body extent -0.74,-0.38 0.74,0.38, height 0.25
FP-C1005-050-0_15-MFG [mm]
  rect 0.4x0.5 smd paste+0 mask+0: 1(-0.4,0) 2(0.4,0)
  silkscreen extent -0.5,-0.72 0.5,0.72, body extent -0.7,-0.43 0.7,0.43, height 0.25
FP-CL05A106MP5NUNC-MFG [mm]
  rect 0.45x0.675 smd paste+0 mask+0: 1(-0.463,0) 2(0.463,0)
  silkscreen extent -0.6,-0.63 0.6,0.63, body extent -0.79,-0.45 0.79,0.45, height 0.25
FP-DQA0010A-MFG [mm]
  rrect50% 0.565x0.2 smd paste+0 mask+0: 1(-0.417,1) 2(-0.417,0.5) 4(-0.417,-0.5) 5(-0.417,-1) 6(0.417,-1) 7(0.417,-0.5) 9(0.417,0.5) 10(0.417,1)
  rrect25% 0.565x0.4 smd paste-1000 mask+0: 3(-0.417,0) 8(0.417,0)
  silkscreen extent -1.37,-1.48 0.55,1.48, body extent -0.8,-1.4 0.8,1.4, height 0.25
FP-ECX-1210-MFG [mm]
  rect 0.575x1.14 smd paste+0 mask+0: 1(-0.413,0) 2(0.413,0)
  silkscreen extent -0.65,-0.95 0.65,0.95, body extent -0.8,-0.67 0.8,0.67, height 0.25
FP-ERJ3EK-MFG [mm]
  rect 0.65x0.9 smd paste+0 mask+0: 1(-0.725,0) 2(0.725,0)
  silkscreen extent 0,-0.48 0,0.48, body extent -0.8,-0.4 0.8,0.4, height 0.55
FP-GRM15-MFG [mm]
  rect 0.4x0.5 smd paste+0 mask+0: 1(-0.4,0) 2(0.4,0)
  silkscreen extent -0.53,-0.63 0.53,0.63, body extent -0.7,-0.38 0.7,0.38, height 0.25
FP-GRM21B-0_2-e0_2_0_7-IPC_B [mm]
  rect 1.255x1.456 smd paste+0 mask+0: 1(-0.826,0) 2(0.826,0)
  silkscreen extent -1.45,-1.13 1.45,1.13, body extent -1,-0.63 1,0.63, height 1.45
FP-GRM188-0_1-e0_2_0_55-IPC_A [mm]
  rect 1.208x1.012 smd paste+0 mask+0: 1(-0.802,0) 2(0.802,0)
  silkscreen extent -1.41,-0.91 1.41,0.91, body extent -0.8,-0.4 0.8,0.4, height 0.9
FP-KXT331LHS-MFG [mm]
  rect 0.55x1.5 smd paste+0 mask+0: 1(-1.625,0) 2(1.625,0)
  silkscreen extent -1.65,-1.15 1.65,1.15, body extent -2,-1.25 2,1.25, height 0.25
FP-NR6028-MFG [mm]
  rect 1.6x5.7 smd paste+0 mask+0: 1(-2.35,0) 2(2.35,0)
  silkscreen extent -1.17,-3.1 1.17,3.1, body extent -3.25,-3.2 3.25,3.2, height 0.25
FP-PFL1609-MFG [mm]
  rect 0.64x1.02 smd paste+0 mask+0: 1(-0.635,0) 2(0.635,0)
  silkscreen extent -0.9,-0.89 0.9,0.89, body extent -0.9,-0.54 0.9,0.54, height 0.95
FP-TSOT26-MFG [mm]
  rect 1x0.7 smd paste+0 mask+0: 1(-1.099,0.95) 2(-1.099,0) 3(-1.099,-0.95) 4(1.099,-0.95) 5(1.099,0) 6(1.099,0.95)
  silkscreen extent -2.32,-1.5 0.22,1.5, body extent -1.7,-1.6 1.7,1.6, height 0.25
"New footprint 1" [mm]
  round 0.6 smd paste-1: 1(0,0)
QFN50P500X500X80_HS-33N [mm] "QFN, 32-Leads, Body 5.00x5.00mm, Pitch 0.50mm, Thermal Pad 3.10x3.10mm, IPC Medium Density"
  oval 0.85x0.25 smd: 1(-2.4,1.75) 2(-2.4,1.25) 3(-2.4,0.75) 4(-2.4,0.25) 5(-2.4,-0.25) 6(-2.4,-0.75) 7(-2.4,-1.25) 8(-2.4,-1.75) 17(2.4,-1.75) 18(2.4,-1.25) 19(2.4,-0.75) 20(2.4,-0.25) 21(2.4,0.25) 22(2.4,0.75) 23(2.4,1.25) 24(2.4,1.75)
  oval 0.25x0.85 smd: 9(-1.75,-2.4) 10(-1.25,-2.4) 11(-0.75,-2.4) 12(-0.25,-2.4) 13(0.25,-2.4) 14(0.75,-2.4) 15(1.25,-2.4) 16(1.75,-2.4) 25(1.75,2.4) 26(1.25,2.4) 27(0.75,2.4) 28(0.25,2.4) 29(-0.25,2.4) 30(-0.75,2.4) 31(-1.25,2.4) 32(-1.75,2.4)
  rect 3.1x3.1 smd: 33(0,0)
  silkscreen extent -3.42,-2.65 2.65,2.65, body extent -2.5,-2.5 2.5,2.5, height 0.8
RESC1005X40X25ML05T05 [mm] "Chip Resistor, 2-Leads, Body 1.00x0.50mm, IPC Low Density"
  rect 0.65x0.65 smd: 1(-0.5,0) 2(0.5,0)
  body extent -0.53,-0.27 0.53,0.28, height 0.4
RESC1005X40X25NL05T10 [mm] "Chip Resistor, 2-Leads, Body 1.00x0.50mm, IPC Medium Density"
  rect 0.6x0.55 smd: 1(-0.425,0) 2(0.425,0)
  body extent -0.53,-0.27 0.53,0.28, height 0.4
RESC1608X55X25LL10T15 [mm] "Chip Resistor, 2-Leads, Body 1.60x0.80mm, IPC High Density"
  rect 0.6x0.8 smd: 1(-0.65,0) 2(0.65,0)
  body extent -0.85,-0.45 0.85,0.45, height 0.55
RESC1608X55X25ML10T15 [mm] "Chip Resistor, 2-Leads, Body 1.60x0.80mm, IPC Low Density"
  rect 0.8x1 smd: 1(-0.75,0) 2(0.75,0)
  body extent -0.85,-0.45 0.85,0.45, height 0.55
RESC1608X55X30LL15T15#1 [mm] "Chip Resistor, 2-Leads, Body 1.60x0.80mm, IPC High Density"
  rect 0.7x0.85 smd: 1(-0.625,0) 2(0.625,0)
  body extent -0.87,-0.48 0.87,0.48, height 0.55
RESC1608X55X30LL15T15#2 [mm] "Chip Resistor, 2-Leads, Body 1.75x0.95mm, IPC High Density"
  rect 0.75x0.85 smd: 1(-0.65,0) 2(0.65,0)
  body extent -0.87,-0.48 0.87,0.48, height 0.55
RESC1608X55X30ML15T15 [mm] "Chip Resistor, 2-Leads, Body 1.60x0.80mm, IPC Low Density"
  rect 0.9x1.05 smd: 1(-0.725,0) 2(0.725,0)
  body extent -0.87,-0.48 0.87,0.48, height 0.55
RESC1608X55X30NL15T15 [mm] "Chip Resistor, 2-Leads, Body 1.60x0.80mm, IPC Medium Density"
  rect 0.8x0.95 smd: 1(-0.675,0) 2(0.675,0)
  body extent -0.87,-0.48 0.87,0.48, height 0.55
RESC1609X55X30LL15T15 [mm] "Chip Resistor, 2-Leads, Body 1.75x0.95mm, IPC High Density"
  rect 0.75x0.85 smd: 1(-0.65,0) 2(0.65,0)
  body extent -0.87,-0.48 0.87,0.48, height 0.55
SOT-223_M [mm] "SOT223, 4-Leads, Body 6.5x3.5mm, Pitch 2.3mm, Lead Span 7mm, IPC Low Density"
  rect 2.7x1 smd: 1(-2.95,2.3) 2(-2.95,0) 3(-2.95,-2.3)
  rect 2.7x3.3 smd: 4(2.95,0)
  silkscreen extent -3.07,-3.35 1.3,3.47, body extent -1.85,-3.35 1.85,3.35, height 1.8
TSQFP50P900X900X160-48N [mm] "TSQFP, 48-Leads, Body 7,00x7,00mm, Pitch 0,50mm, IPC Medium Density"
  oval 1.45x0.3 smd: 1(-4.225,2.75) 2(-4.225,2.25) 3(-4.225,1.75) 4(-4.225,1.25) 5(-4.225,0.75) 6(-4.225,0.25) 7(-4.225,-0.25) 8(-4.225,-0.75) 9(-4.225,-1.25) 10(-4.225,-1.75) 11(-4.225,-2.25) 12(-4.225,-2.75) 25(4.225,-2.75) 26(4.225,-2.25) 27(4.225,-1.75) 28(4.225,-1.25) 29(4.225,-0.75) 30(4.225,-0.25) 31(4.225,0.25) 32(4.225,0.75) 33(4.225,1.25) 34(4.225,1.75) 35(4.225,2.25) 36(4.225,2.75)
  oval 0.3x1.45 smd: 13(-2.75,-4.225) 14(-2.25,-4.225) 15(-1.75,-4.225) 16(-1.25,-4.225) 17(-0.75,-4.225) 18(-0.25,-4.225) 19(0.25,-4.225) 20(0.75,-4.225) 21(1.25,-4.225) 22(1.75,-4.225) 23(2.25,-4.225) 24(2.75,-4.225) 37(2.75,4.225) 38(2.25,4.225) 39(1.75,4.225) 40(1.25,4.225) 41(0.75,4.225) 42(0.25,4.225) 43(-0.25,4.225) 44(-0.75,4.225) 45(-1.25,4.225) 46(-1.75,4.225) 47(-2.25,4.225) 48(-2.75,4.225)
  silkscreen extent -4.35,-3.1 3.1,3.57, body extent -3.5,-3.5 3.5,3.5, height 1.6
WL-SBCD_0606 [mm] "SMT Bi-color Chip LED Diffuesed, body 1.5x1.6mm"
  rect 0.5x0.8 smd: 1(-0.45,0.8) 2(-0.45,-0.8) 3(0.45,-0.8) 4(0.45,0.8)
  silkscreen extent -0.07,1.47 0.07,1.62, body extent -0.75,-0.8 0.75,0.8, height 0.55

## Part data
C1 C17 C23 C24 C26 C27 C28: library part CMP-13271-000002-1, "CAP CER 10UF 10V X5R 0402", Capacitance=10uF, Manufacturer=Samsung, Temperature="-55°C to +85°C", Temperature Characteristic=X5R, Temperature Coefficient=15%, Temperature Range High=+85°C, Temperature Range Low=-55°C, Tolerance=20%, Voltage Rating=10V, Automotive=No, Category=Cap, ComponentLink2Description=Datasheet, ComponentLink2URL=http://www.samsungsem.com/kr/support/product-search/mlcc/__icsFiles/afieldfile/2019/05/10/19-CL05A106MP5NUNC.pdf, Device Class L1="Passive Components", Device Class L2=Capacitors, Device Class L3="Ceramic Capacitors", Digikey Description="CAP CER 10UF 10V X5R 0402", Height=0.7mm, Ipc Land Pattern Name=CAPC10050X50, Lead Free=Yes, Manufacturer Part Number=CL05A106MP5NUNC, Material=Ceramic, Octopart=https://octopart.com/cl05a106mp5nunc-samsung-22457395, Package=CL05A106MP5NUNC, RoHS=TRUE
C2 C3 C4 C5 C6 C7 C8 C9 C10 C11 C12 C13 C14 C20 C22 C25 C30 C55 C56: library part CMP-2000-05393-2, "Multilayer Ceramic Capacitors 100nF ±10% 50V X7R SMD 0402", Capacitance=100nF, Case Code (Imperial)=0402, Case Code (Metric)=1005, Dielectric=X7R, Dielectric Material=Ceramic, Max Operating Temperature=125°C, Min Operating Temperature=-55°C, Package Quantity=1, Tolerance=10%, Voltage=50V, Case/Package=0402, Construction=Flat, Depth=0.5mm, Height=0.5mm, Lead Free="Lead Free", Length=1mm, Mount="Surface Mount", Packaging="Tape and Reel", Radiation Hardening=No, REACH SVHC="No SVHC", Resistor Type=Ceramic, RoHS Compliant=Yes, Series=C, Termination=SMD/SMT, Thickness=0.022inch, Voltage Rating=50V, Voltage Rating (DC)=50V, Weight=2.3E-05oz, Width=0.02inch
C15 C16: library part CMP-1035-00914-3, "CAP CER 30PF 50V 5% NP0 0603", Capacitance="30 pF", Manufacturer=KEMET, Package=C0603C-CF, Temperature="-55°C to +125°C", Temperature Characteristic=C0G, Temperature Coefficient=30ppm/°C, Temperature Range High=+125°C, Temperature Range Low=-55°C, Tolerance=0.05, Voltage Rating="50 V", Automotive=Yes, Automotive Grade="Grade 1", Category=Cap, ComponentLink2Description=Datasheet, ComponentLink2URL=https://api.kemet.com/component-edge/download/datasheet/C0603C100J5GACAUTO.pdf, Device Class L1="Passive Components", Device Class L2=Capacitors, Device Class L3="Ceramic Capacitors", Digikey Description="CAP CER 30PF 50V 5% NP0 0603", Height=0.87mm, Lead Free=Yes, Manufacturer Part Number=C0603C300J5GACTU, Material=Ceramic, Mouser Description="Multilayer Ceramic Capacitors MLCC - SMD/SMT 50volts 30pF C0G 5%", Octopart=https://octopart.com/c0603c300j5gactu-kemet-199455, RoHS=TRUE
C18 C19 C21: library part CMP-1034-01887-3, "CAP CER 10000PF 50V 20% X7R 0402", Capacitance="10,000 pF", Manufacturer=Kemet, Package=C0402-BB, Temperature="-55°C to +125°C", Temperature Characteristic=X7R, Temperature Coefficient=15%, Temperature Range High=+125°C, Temperature Range Low=-55°C, Tolerance=0.2, Voltage Rating="50 V", Automotive=No, Category=Cap, ComponentLink2Description=Datasheet, ComponentLink2URL=https://content.kemet.com/datasheets/KEM_C1002_X7R_SMD.pdf, Device Class L1="Passive Components", Device Class L2=Capacitors, Device Class L3="Ceramic Capacitors", Digikey Description="CAP CER 10000PF 50V 20% X7R 0402", Height=0.55mm, Ipc Land Pattern Name=CAPC10050X50, Lead Free=Yes, Manufacturer Part Number=C0402C103M5RACTU, Material=Ceramic, Mouser Description="Cap Ceramic 0.01uF 50V X7R 20% SMD 1.0 x 0.5 mm 125 C Paper T/R", Octopart=https://octopart.com/c0402c103m5ractu-kemet-17125571, RoHS=TRUE
C29 C31 C32 C33 C34 C35 C36: library part CMP-2007-03222-3, "Chip Multilayer Ceramic Capacitors for General Purpose, 0805, 22uF, X5R, 15%, 20%, 25V", Capacitance=22uF, Case Code (Imperial)=0805, Case Code (Metric)=2012, Dielectric=X5R, Max Operating Temperature=85°C, Min Operating Temperature=-55°C, Package Quantity=3000, Resistor Type=Ceramic, Tolerance=20%, Voltage=25V, Case/Package=0805, Depth=1.25mm, Height=1.25mm, Lead Free="Lead Free", Length=2mm, Material=Ceramic, Mount="Surface Mount", Packaging="Tape and Reel", REACH SVHC="No SVHC", Termination=SMD/SMT, Thickness=0.057inch, Voltage Rating=25V, Voltage Rating (DC)=25V, Weight=0.000335oz, Width=1.25mm
C37 C38: library part CMP-2008-02046-2, "CAP CER 0.1UF 10V X5R 0402", Capacitance="0.10 μF", Manufacturer=Kemet, Package=C0402-BB, Temperature="-55°C to +125°C", Temperature Characteristic=X5R, Temperature Coefficient=15%, Temperature Range High=+125°C, Temperature Range Low=-55°C, Tolerance=0.1, Voltage Rating="10 V", Automotive=No, Category=Cap, ComponentLink2Description=Datasheet, ComponentLink2URL=https://content.kemet.com/datasheets/KEM_C1002_X7R_SMD.pdf, Device Class L1="Passive Components", Device Class L2=Capacitors, Device Class L3="Ceramic Capacitors", Digikey Description="CAP CER 0.1UF 10V X5R 0402", Height=0.55mm, Ipc Land Pattern Name=CAPC10050X50, Lead Free=Yes, Manufacturer Part Number=C0402C104K8PACTU, Material=Ceramic, Mouser Description="Capacitor 100 nF 10 VDC 0402", Octopart=https://octopart.com/c0402c104k8pactu-kemet-140039, RoHS=TRUE
C39: library part CMP-2000-05997-2, "CAP CER 4.7UF 10V X5R 0402", Capacitance=4.7uF, Case Code (Imperial)=0402, Case Code (Metric)=1005, Dielectric=X5R, Dielectric Material=Ceramic, Max Operating Temperature=85°C, Min Operating Temperature=-55°C, Package Quantity=10000, Tolerance=10%, Voltage Rating=10V, Case/Package=0402, Lead Free="Lead Free", Length=0.039inch, Mount="Surface Mount", Packaging="Cut Tape", REACH SVHC="No SVHC", RoHS Compliant=Yes, Series=C, Thickness=0.022inch, Voltage Rating (DC)=10V, Width=0.02inch
C40 C41 C42 C44 C46 C48: library part CMP-2100-03641-2, "CAP CER 0.1UF 16V X7R 0402", Capacitance=0.10μF, Manufacturer=Murata, Package=GRM15, Temperature="-55°C to +125°C", Temperature Characteristic=X7R, Temperature Range High=+125°C, Temperature Range Low=-55°C, Tolerance=10%, Voltage Rating=16Vdc, Category=Cap, ComponentLink2Description=Datasheet, ComponentLink2URL=https://search.murata.co.jp/Ceramy/image/img/A01X/G101/ENG/GRM155R71H471KA01-01A.pdf, Device Class L1="Passive Components", Device Class L2=Capacitors, Device Class L3="Ceramic Capacitors", Digikey Description="CAP CER 0.1UF 16V X7R 0402", Height=0.55mm, Ipc Land Pattern Name=CAPC10050X219, Lead Free=yes, Manufacturer Part Number=GRM155R71C104KA88D, Material=Ceramic, Mouser Description="0402 0.1 uF 16V ±10 % Tolerance X7R SMT Multilayer Ceramic Capacitor", Octopart=https://octopart.com/grm155r71c104ka88d-murata-196880, RoHS=TRUE, Standoff Height=0mm
C43 C45 C47: library part CMP-14477-000104-2, "None", Capacitance=1uF, Case Code (Imperial)=0402, Case Code (Metric)=1005, Dielectric=X5R, Max Operating Temperature=85°C, Min Operating Temperature=-55°C, Package Quantity=1, Tolerance=10%, Voltage Rating=16V, Case/Package=0402, Construction=Flat, Depth=0.5mm, Halogen Free="Halogen Free", Height=0.5mm, Length=1mm, Mount="Surface Mount", Number of Pins=2, Packaging="Tape and Reel", Radiation Hardening=No, RoHS Compliant=Yes, Series=M, Termination=SMD/SMT, Thickness=0.022inch, Voltage Rating (DC)=16V, Width=0.02inch
C49 C50: library part CMP-1034-00517-3, "CAP CER 6.8PF 50V NP0 0402", Capacitance="6.8 pF", Manufacturer=Kemet, Package=C0402-BB, Temperature="-55°C to +125°C", Temperature Characteristic=C0G, Temperature Coefficient=15%, Temperature Range High=+125°C, Temperature Range Low=-55°C, Tolerance="0.25 pF", Voltage Rating="50 V", Automotive=No, Category=Cap, ComponentLink2Description=Datasheet, ComponentLink2URL=https://content.kemet.com/datasheets/KEM_C1002_X7R_SMD.pdf, Device Class L1="Passive Components", Device Class L2=Capacitors, Device Class L3="Ceramic Capacitors", Digikey Description="CAP CER 6.8PF 50V NP0 0402", Height=0.55mm, Ipc Land Pattern Name=CAPC10050X50, Lead Free=Yes, Manufacturer Part Number=C0402C689C5GACTU, Material=Ceramic, Mouser Description="Cap Ceramic 6.8pF 50V C0G 0.25pF SMD 0402 125°C Paper T/R", Octopart=https://octopart.com/c0402c689c5gactu-kemet-9143567, RoHS=TRUE
C51 C52: library part CMP-2008-02590-2, "General Purpose Ceramic Capacitor, 0402, 18pF, 1%, C0G, 30ppm/°C, 50V", Capacitance=18pF, Case Code (Imperial)=0402, Case Code (Metric)=1005, Dielectric=C0G, Max Operating Temperature=125°C, Min Operating Temperature=-55°C, Package Quantity=1, Tolerance=1%, Voltage Rating=50V, Case/Package=0402, Construction=Flat, Contact Plating=Tin, Depth=0.5mm, Lead Free="Lead Free", Length=1mm, Mount="Surface Mount", Number of Pins=2, Packaging="Tape and Reel", Radiation Hardening=No, REACH SVHC="No SVHC", RoHS Compliant=Yes, Series=-, Termination=SMD/SMT, Thickness=0.022inch, Voltage Rating (DC)=50V, Width=0.5mm
C53 C54: library part CMP-2006-02792-2, "Chip Multilayer Ceramic Capacitors for General Purpose, 0603, 10uF, X5R, 15%, 20%, 6.3V", Capacitance=10uF, Case Code (Imperial)=0603, Case Code (Metric)=1608, Dielectric=X5R, Max Operating Temperature=85°C, Min Operating Temperature=-55°C, Package Quantity=4000, Tolerance=20%, Voltage=6.3V, Case/Package=0603, Depth=0.8mm, Height=0.8mm, Lead Free="Lead Free", Length=1.6mm, Material=Ceramic, Mount="Surface Mount", Packaging="Tape and Reel", Radiation Hardening=No, REACH SVHC="No SVHC", Termination=SMD/SMT, Thickness=0.035inch, Voltage Rating=6.3V, Voltage Rating (DC)=6.3V, Width=0.031inch
D1: library part CMP-04989-000002-1, "4-CHANNEL LOW-CAPACITANCE SURGE", Ambient Temperature Range High=+125°C, Ambient Temperature Range Low=-40°C, Breakdown Voltage=5.5V, Capacitance=0.55pF, Clamping Voltage=11.5V, Manufacturer="Texas Instruments", Package=DQA0010A, Peak Pulse Current=5.5A, Peak Pulse Power=50W, Reverse Standoff Voltage=3.6V, Temperature="-40°C to +125°C", Automotive=No, Category=Diode, ComponentLink2Description=Datasheet, ComponentLink2URL=http://www.ti.com/lit/ds/symlink/esd204.pdf, Device Class L1="Circuit Protection", Device Class L2="TVS Diodes", Device Class L3=unset, Digikey Description="4-CHANNEL LOW-CAPACITANCE SURGE", Direction=Bidirectional, Height=0.55mm, Lead Free=Yes, Manufacturer Part Number=ESD204DQAR, Mouser Description="4-Channel Low-Capacitance Surge and ESD Protection Diode 10-USON -40 to 125", Number of Channels=4, Octopart=https://octopart.com/esd204dqar-texas+instruments-89917476, RoHS=TRUE, Standoff Height=0mm, Temperature Range High=+125°C, Temperature Range Low=-40°C
D2 D3: library part CMP-004-00040-2, "Led, Red/Grn, 180Mcd/230Mcd, 624Nm/525Nm Rohs Compliant: Yes", Component Type=Standard, Design Item ID=CMP-004-00034-2, Pins=4, Source=rgled.SchLib
F1: library part CMP-08606-000071-1, "PTC RESET FUSE 60V 500MA 2920", Case Code (Imperial)=2920, Case Code (Metric)=7351, Current Rating=10A, Hold Current=500mA, Max Operating Temperature=85°C, Max Voltage Rating (DC)=60V, Min Operating Temperature=-40°C, Package Quantity=1500, Power Dissipation=1.5W, Resistance=1.4R, Trip Current=1A, Approvals=cULus, Case/Package=2920, Height=1.25mm, Lead Free="Lead Free", Length=7.98mm, Max Current Rating=10A, Operating Supply Voltage=60V, Packaging="Tape and Reel", REACH SVHC="No SVHC", RoHS Compliant=Yes, Series=2920L, Terminal Material=Copper, Termination=SMD/SMT, Time to Trip=4s, Voltage Rating=60V, Voltage Rating (DC)=60V, Width=5.44mm, Working Voltage=60V
FB1: library part CMP-0686-00252-4, "Chip Ferrite Bead, 0402, 600Ω @ 100MHz, 0.23Ω, 25%, 900mA", Case Code (Imperial)=0402, Case Code (Metric)=1005, Current Rating=900mA, DC Resistance (DCR)=230mR, Max Operating Temperature=125°C, Min Operating Temperature=-55°C, Package Quantity=10000, Test Frequency=100MHz, Tolerance=25%, Case/Package=0402, Height=0.5mm, Impedance=600R, Lead Free="Lead Free", Length=1mm, Material=Steel, Max Current Rating=900mA, Max DC Current=900mA, Number of Circuits=1, Number of Lines=1, Number of Pins=2, Packaging="Tape and Reel", Termination=SMD/SMT, Width=0.5mm
J1: library part CMP-03368-000001-1, "CONN FPC VERT 15POS 1.00MM SMD", Current Rating=1A, Manufacturer=TE, Package=0, Temperature="-20°C to +85°C", Temperature Range High=+85°C, Temperature Range Low=-20°C, Voltage Rating=125V, Automotive=No, Category=Conn, ComponentLink2Description=Datasheet, ComponentLink2URL=https://www.te.com/commerce/DocumentDelivery/DDEController?Action=showdoc&DocId=Customer+Drawing%7F1734248%7FE1%7Fpdf%7FEnglish%7FENG_CD_1734248_E1__.pdf%7F1-1734248-5, Conn Gender=Female, Conn Orientation=Vertical, Contact Material=Gold,Nickel, Device Class L1=Connectors, Device Class L2="FFC / FPC", Device Class L3=unset, Digikey Description="CONN FPC VERT 15POS 1.00MM SMD", Height=8mm, Is Female=yes, Lead Free=Yes, Manufacturer Part Number=1-1734248-5, Mounting Type="Surface Mount", Mouser Description="FFC & FPC Connectors 15P 1.0 FPC, Zip V/T SMT", Number of Contacts=15, Octopart=https://octopart.com/1-1734248-5-te+connectivity-40620898, Pitch=1mm, RoHS=TRUE
J2: library part CMP-002-00054-1, "RF F Connector, Male, Board Mount, Solder Terminal, Plug", Connector Type="RF F CONNECTOR", Mounting Technology=Board, RoHS Compliant=Yes
J3: library part CMP-001-0013-3, "CONN HEADER SMD 10POS 1.27MM"
L1: library part CMP-11268-000041-1, "NOT COILCRAFT - ACTUAL P# --> ADL32VHC-220M /  - Power Injection Chokes for PoC", Ambient Temperature Range High=+125°C, Ambient Temperature Range Low=-40°C, Inductance=22uH, Manufacturer=coilcraft, Manufacturer Part Number=1210POC-223MRC, Package=1210POC, Rms Current=700mA, Saturation Current=720mA, Self Resonant Frequency=70MHz, Series Resistance=0.88Ω, Test Frequency=100kHz, Tolerance=20%, Automotive=Yes, Automotive Grade="Grade 1", Category=Ind, ComponentLink2Description=Datasheet, ComponentLink2URL=https://drive.google.com/open?id=15FlOq8Y4YbRFohfA_cJ40jgnqs8va2Mh, Core Material=Ferrite, Device Class L1="Passive Components", Device Class L2=Inductors, Device Class L3="Fixed Inductors", Height=3mm, Lead Free=Yes, Octopart=https://octopart.com/1210poc-223mrc-coilcraft-103207315, RoHS=TRUE
L2: library part CMP-11268-000007-1, "Fixed Inductors PFL1609 Low Profile 0.56 uH 20 % 1.4 A", Ambient Temperature Range High=+105°C, Ambient Temperature Range Low=-40°C, Inductance=0.56uH, Manufacturer=coilcraft, Package=PFL1609, Rms Current=1100mA, Saturation Current=710mA, Self Resonant Frequency=600MHz, Series Resistance=130mΩ, Test Frequency=7.9MHz, Tolerance=20%, Automotive=Yes, Automotive Grade="Grade 1", Category=Ind, ComponentLink2Description=Datasheet, ComponentLink2URL=https://www.coilcraft.com/pdfs/pfl1609.pdf, Composition=Wirewound, Core Material=Composite, Device Class L1="Passive Components", Device Class L2=Inductors, Device Class L3="Fixed Inductors", Height=0.95mm, Lead Free=Yes, Manufacturer Part Number=PFL1609-561MEW, Mouser Description="Fixed Inductors PFL1609 Low Profile 0.56 uH 20 % 1.4 A", Octopart=https://octopart.com/pfl1609-561mew-coilcraft-20329171, RoHS=TRUE, Shielding=true
L3: library part CMP-14484-000037-2, "SMD Power Inductors 4.7uH ±20% 2.7A 40.3mΩ", Case/Package=2424, Current Rating=3A, DC Resistance (DCR)=40.3mR, Inductance=4.7uH, Inductance Tolerance=20%, Max Operating Temperature=120°C, Min Operating Temperature=-25°C, Package Quantity=2000, Resistor Type=Wirewound, Saturation Current=2.7A, Self Resonant Frequency=39MHz, Test Frequency=100kHz, Core Material=Ferrite, Depth=6.2mm, Halogen Free="Halogen Free", Height=2.8mm, Height - Seated (Max)=0.11inch, Lead Free="Lead Free", Length=0.236inch, Max DC Current=3A, Mount="Surface Mount", Number of Pins=2, Packaging="Tape and Reel", Radiation Hardening=No, RMS Current (Irms)=3A, RoHS Compliant=Yes, Series=NR, Shielding=Shielded, Termination=SMD/SMT, Tolerance=20%, Width=0.236inch
R16 R27 R28 R29 R31 R43 R44 R46 R47 R48 R49: library part CMP-1011-00001-2, Manufacturer="Yageo / Phycomp", Part Number=RC0402JR-070RL
R17: library part CMP-2000-00651-1, Manufacturer=Panasonic, Part Number=ERJ-3EKF8062V
R18: library part CMP-2000-00323-1, Manufacturer=Panasonic, Part Number=ERJ-3EKF2052V